# Altium PCB Kelpie_Pi_Hat.PcbDoc
Units mm, origin at the board's own origin, x right, y up, seen from the top; angles counter-clockwise.
Board outline 65 x 30 mm, 2 copper layers (Top Layer, Bottom Layer), stack 1.57 mm thick; 4 components, 23 nets, 71 pads, 1 vias.
Unrouted connection lines stored in the file: 1.
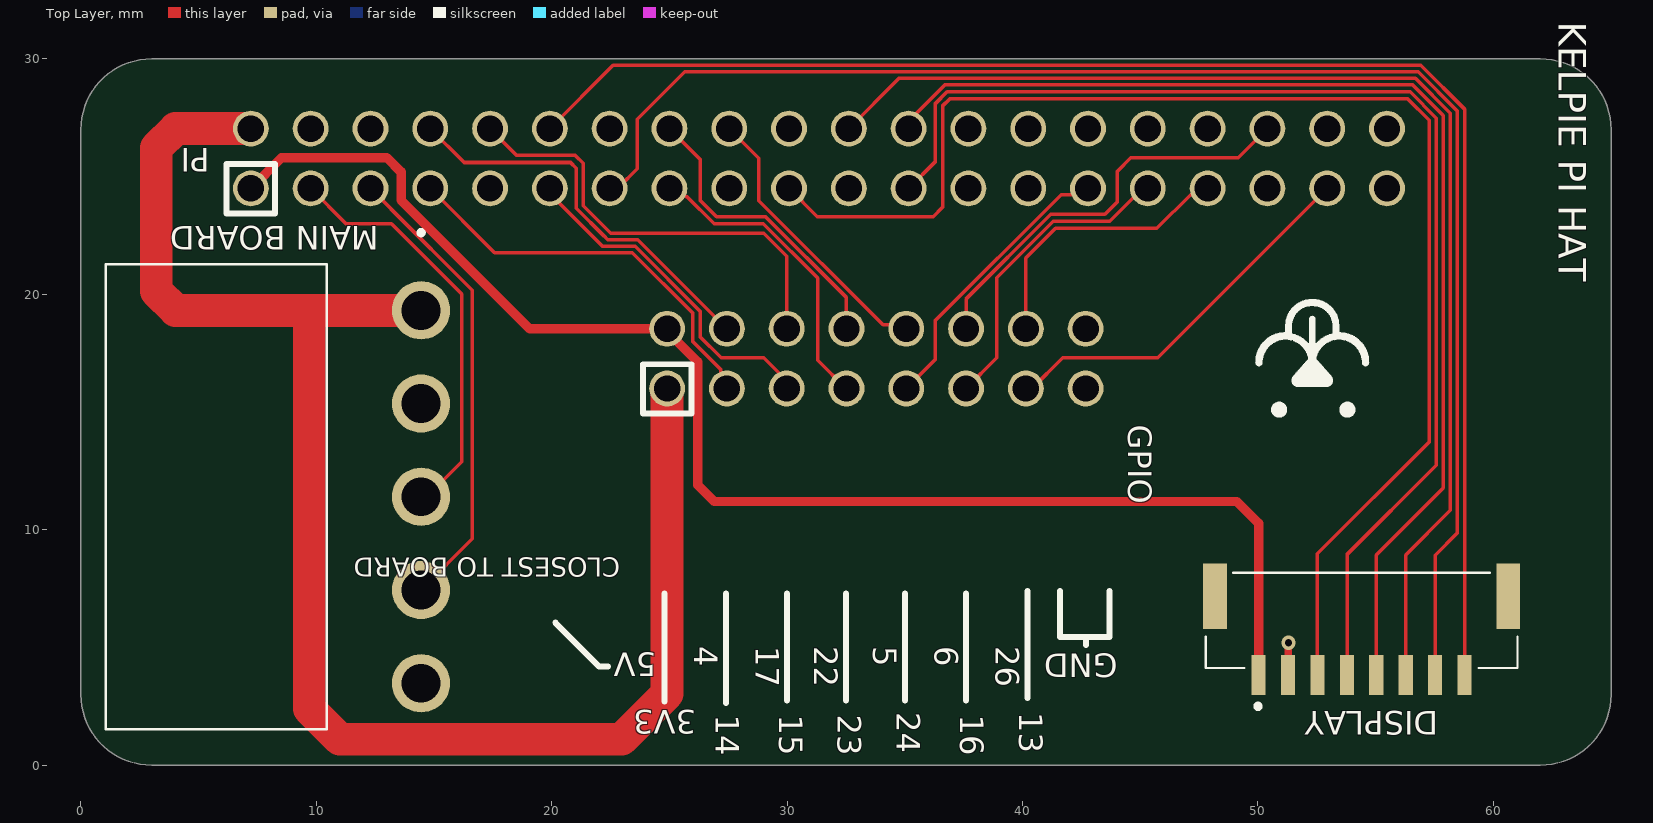
[diagram p0: Top Layer view]
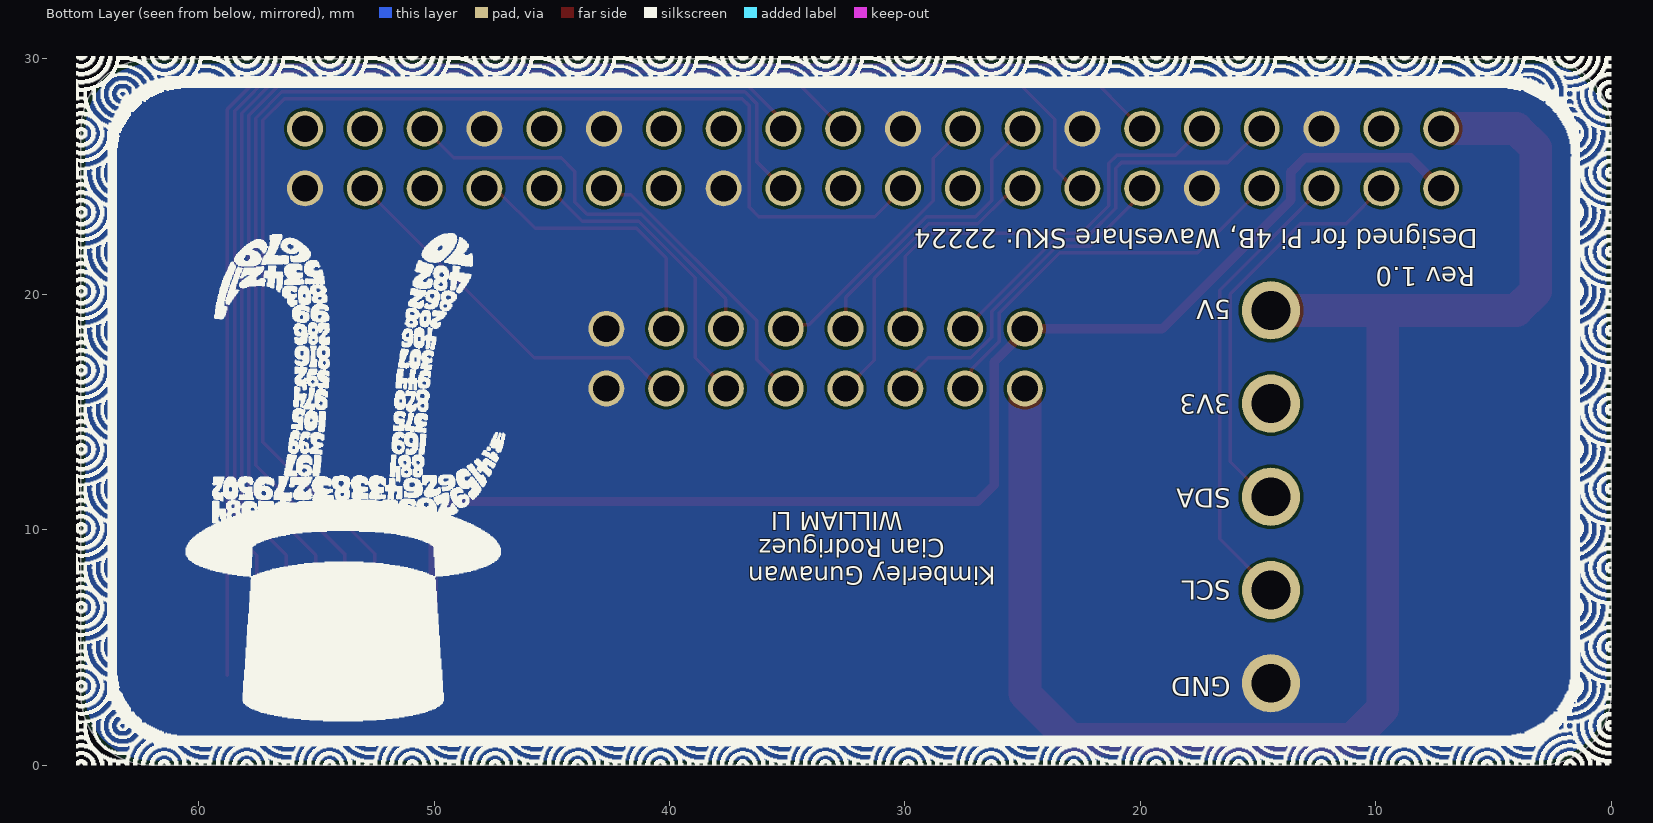
[diagram p1: Bottom Layer view, seen from below]
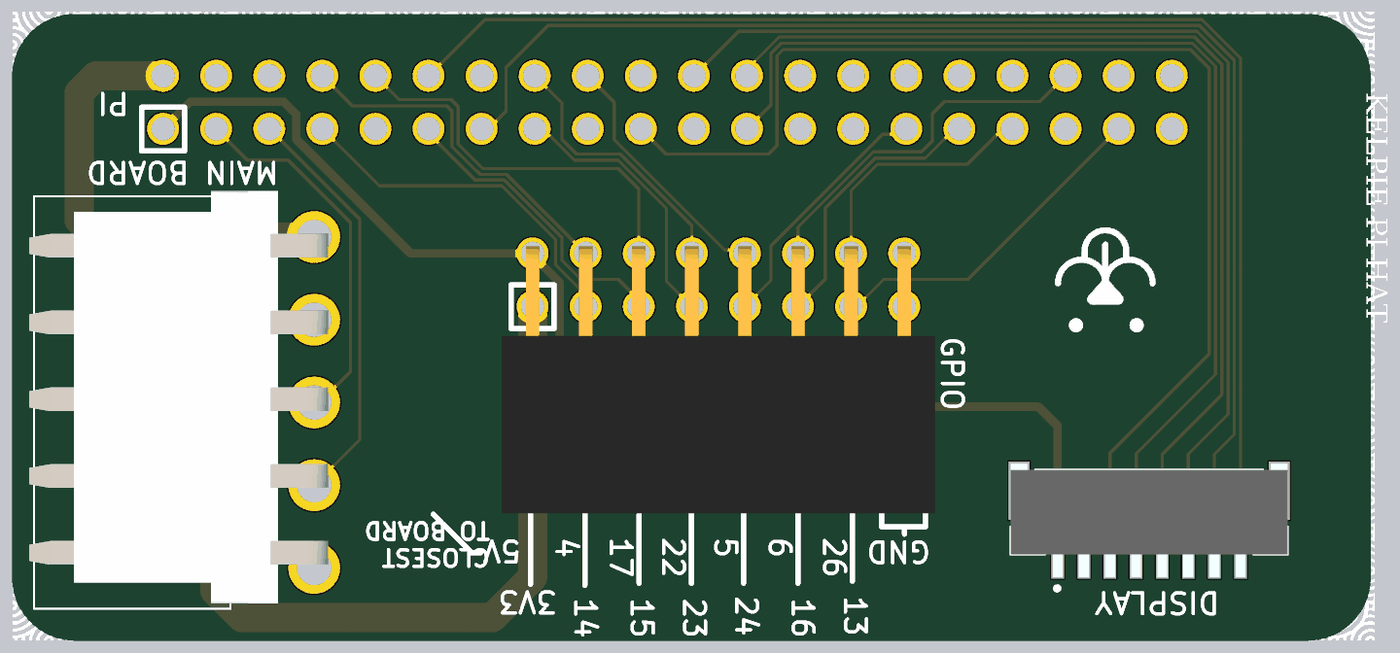
[diagram p2: 3D render of the assembled board from above, using the file's embedded part models]

## Layer stack, top to bottom
Top Solder: solder mask 0.0127, Solder Resist, Dk 3.8
Top Layer: signal copper 0.035
Dielectric: core 1.5, FR-4, Dk 4.5
Bottom Layer: signal copper 0.035
Bottom Solder: solder mask 0.0127, Solder Resist, Dk 3.8

## Board outline
0,3 0,27 cw(c3,27) 3,30 62,30 cw(c62,27) 65,27 65,3 cw(c62,3) 62,0 3,0 cw(c3,3)

## Design rules (kind name [scope] priority, off if disabled: settings)
BoardOutlineClearance [All] p1: gap=0.2 ignorepadtopadclearanceinfootprint=FALSE
Clearance [All] p1: gap=0.127 ignorepadtopadclearanceinfootprint=FALSE except(0.25: Arc-Hole Track-Hole SMDPad-Hole THPad-Hole Via-Hole Fill-Hole Poly-Hole Region-Hole Text-Hole)
ComponentClearance [All] p1: gap=0.127 collisioncheckmode=3 verticalgap=0.127 showdistances=TRUE
DiffPairsRouting [All] p1: maxlimit=0.254 minlimit=0.127 mostfreqgap=0.127 toplayer_minwidth=0.127 toplayer_maxwidth=25.4 toplayer_prefwidth=0.127 bottomlayer_minwidth=0.127 bottomlayer_maxwidth=25.4 bottomlayer_prefwidth=0.127 maxuncoupledlength=12.7
Height [All] p1: minheight=0 maxheight=1816.048 prefheight=12.7
HoleSize [All] p1: absolutevalues=TRUE maxlimit=6.3 minlimit=0.3 maxpercent=80.000 minpercent=20.000
HoleToHoleClearance [All] p1: gap=0.25 allowstackedmicrovias=FALSE
MinimumAnnularRing [All] p1: minimumring=0.076
MinimumSolderMaskSliver [All] p1: minsoldermaskwidth=0
PlaneClearance [All] p1: clearance=0.127
PlaneConnect PlaneConnectPowerPads [InPadClass('PowerPads')] p1: planeconnectstyle=Direct reliefexpansion=0.508 reliefentries=4 reliefconductorwidth=0.254 reliefairgap=0.254
PlaneConnect [All] p2: planeconnectstyle=Direct reliefexpansion=0.3 reliefentries=4 reliefconductorwidth=0.127 reliefairgap=0.127
PolygonConnect PolygonConnectPowerPads [All vs (InPadClass('PowerPads'))] p1: connectstyle=Direct reliefconductorwidth=0.254 reliefentries=4 polygonreliefangle="90 Angle" airgapwidth=0.254
PolygonConnect [All] p2: thpad.connectstyle=Direct thpad.reliefconductorwidth=0.127 thpad.reliefentries=4 thpad.polygonreliefangle="90 Angle" thpad.airgapwidth=0.127 smdpad.connectstyle=Relief smdpad.reliefconductorwidth=0.127 smdpad.reliefentries=4 smdpad.polygonreliefangle="90 Angle" smdpad.airgapwidth=0.127 via.connectstyle=Direct via.reliefconductorwidth=0.127 via.reliefentries=4 via.polygonreliefangle="90 Angle" via.airgapwidth=0.127
RoutingVias [All] p1: holewidth=0.3 width=0.6 viastyle="Through Hole" minholewidth=0.3 minwidth=0.6 maxholewidth=0.6 maxwidth=6.6
SilkToSilkClearance [All] p1: silktosilkclearance=0
SilkToSolderMaskClearance [IsPad] p1: minsilkscreentomaskgap=0.127 clearancetoexposedcopper=TRUE
SolderMaskExpansion [All] p1: expansion=0.075 istentingtop=FALSE
Width [All] p1: maxlimit=25.4 minlimit=0.127 preferedwidth=0.127 minimp=50.000000 maximp=50.000000 favimp=50.000000
20 further rules are at their usual default settings.

## Components (designator, comment, footprint, x,y, rotation, side; value= is the part's Value field where it differs from the comment)
DISPLAY "JST-GH 8Pin Side" BM08BGHSTBTLFSN 54.4,6 r180 top locked (schematic designator J3)
GPIO "8x2_PIN_FEMALE_HEADER" 8x2_PIN_FEMALE_HEADER 24.9,16 r0 top locked (schematic designator J4)
"MAIN BOARD" "JST-VH 5Pin Side" B5PSVHLFSN 14.45,19.32 r270 top locked (schematic designator J2)
PI "PI_HEADER" PI_HEADER 7.22,24.5 r0 top locked (schematic designator J1)

## Footprints (in the part's own frame and the unit in brackets; to place one, negate y for a bottom-side part, rotate by r counter-clockwise, add the part's x,y. Pads: shape width x height; smd on the part's side, far side on the other; paste and mask are expansions set on the pad)
8x2_PIN_FEMALE_HEADER [mil] "https://core-electronics.com.au/0-100-2-54-mm-female-header-2x8-pin-straight.html"
  round 60 hole 44.09: 1(0,0) 2(0,100) 3(100,0) 4(100,100) 5(200,0) 6(200,100) 7(300,0) 8(300,100) 9(400,0) 10(400,100) 11(500,0) 12(500,100) 13(600,0) 14(600,100) 15(700,0) 16(700,100)
  silkscreen extent -41,-42 41,41, body extent -58,-390 758,113, height 188
B5PSVHLFSN [mm]
  round 2.475 hole 1.65: 1(0,0) 2(3.96,0) 3(7.92,0) 4(11.88,0) 5(15.84,0)
  silkscreen extent -3.4,-13.4 17.79,0.1, body extent -2.2,-13.63 17.54,0.66, height 8.48
BM08BGHSTBTLFSN [mm]
  rect 0.6x1.7 smd: 1(4.375,2.175) 2(3.125,2.175) 3(1.875,2.175) 4(0.625,2.175) 5(-0.625,2.175) 6(-1.875,2.175) 7(-3.125,2.175) 8(-4.375,2.175)
  rect 1x2.8 smd: 9(-6.225,-1.175) 10(6.225,-1.175)
  silkscreen extent -6.63,-2.17 6.63,3.6, body extent -6.63,-2.47 6.63,2.97, height 4.15
PI_HEADER [mil] "40 Pin (20x2) Female Header Row (Adafruit 2243)"
  round 60 hole 44.09: 1(0,0) 2(0,100) 3(100,0) 4(100,100) 5(200,0) 6(200,100) 7(300,0) 8(300,100) 9(400,0) 10(400,100) 11(500,0) 12(500,100) 13(600,0) 14(600,100) 15(700,0) 16(700,100) 17(800,0) 18(800,100) 19(900,0) 20(900,100) 21(1000,0) 22(1000,100) 23(1100,0) 24(1100,100) 25(1200,0) 26(1200,100) 27(1300,0) 28(1300,100) 29(1400,0) 30(1400,100) 31(1500,0) 32(1500,100) 33(1600,0) 34(1600,100) 35(1700,0) 36(1700,100) 37(1800,0) 38(1800,100) 39(1900,0) 40(1900,100)
  silkscreen extent -41,-42 41,41, body extent -65,-47 1963,150, height 83

## Part data
DISPLAY: library part BM08B-GHS-TBT_LF__SN_, "Connector", Manufacturer_Name="JST (JAPAN SOLDERLESS TERMINALS)", Manufacturer_Part_Number=BM08B-GHS-TBT(LF)(SN), Datasheet Link=http://www.jst-mfg.com/product/pdf/eng/eGH.pdf, Height=4.05mm
GPIO: "https://core-electronics.com.au/0-100-2-54-mm-female-header-2x8-pin-straight.html"
"MAIN BOARD": library part B5PS-VH_LF__SN_, "Connector", Arrow Part Number=B5PS-VH(LF)(SN), Manufacturer_Name="JST (JAPAN SOLDERLESS TERMINALS)", Arrow Price/Stock=https://www.arrow.com/en/products/b5ps-vh-lf-sn/jst-manufacturing?region=europe, Datasheet Link=http://uk.rs-online.com/web/p/products/8201166, Height=8.5mm, Manufacturer_Part_Number=B5PS-VH(LF)(SN)
PI: "40 Pin (20x2) Pi Header (Adafruit 2243)"

## Via types
v1: diameter 0.6, hole 0.3, Top Layer to Bottom Layer, tented both sides, 1 vias

## Nets (pads, with @x,y where several pads share a name; then routed paths per layer and width w, separated by ;. In a path a pad name is that pad's centre, name@x,y a point inside that pad or via, vN(x,y) a via of type N, cw(c..) or ccw(c..) an arc to the next point about the centre after c; other vN are vias at no path point)
3V3: DISPLAY.1 GPIO.2 PI.1 | length 60.1
  Top Layer w0.4: PI.1 8.52,25.8 13,25.8 13.6,25.2 13.6,24 19.06,18.54 GPIO.2 24.9,18.431 26.2,17.131 26.2,11.9 26.9,11.2 49.1,11.2 50.025,10.275 DISPLAY.1
+5: "MAIN BOARD.1" GPIO.1 PI.2 PI.4 | length 67.1
  Top Layer w1.4: PI.2 4.02,27.04 3.2,26.22 3.2,20.14 4.02,19.32 13.383,19.32 ; 9.7,18.717 9.7,2.4 11,1.1 22.966,1.1 24.9,3.034 GPIO.1 ; 14.159,19.32 14.45,19.32
BL: DISPLAY.8 PI.12 | length 64.8
  Top Layer w0.15: PI.12 22.605,29.725 56.92,29.725 58.775,27.87 DISPLAY.8
CLK: DISPLAY.4 PI.23 | length 51.3
  Top Layer w0.15: PI.23 36.3,25.64 36.3,28.108 36.792,28.6 56.462,28.6 57.575,27.487 57.575,12.741 53.784,8.95 DISPLAY.4@53.784,3.825
CS: DISPLAY.5 PI.24 | length 49.2
  Top Layer w0.15: PI.24 35.16,27.36 36.694,28.894 56.576,28.894 57.875,27.595 57.875,11.775 55.025,8.925 DISPLAY.5
DC: DISPLAY.6 PI.22 | length 51.7
  Top Layer w0.15: PI.22 34.751,29.171 56.691,29.171 58.175,27.687 58.175,10.825 56.275,8.925 DISPLAY.6
DIN: DISPLAY.3 PI.19 | length 58.2
  Top Layer w0.15: PI.19 31.28,23.3 36.2,23.3 36.6,23.7 36.6,28 36.9,28.3 56.37,28.3 57.275,27.395 57.275,13.725 52.525,8.975 DISPLAY.3
GND: "MAIN BOARD.5" DISPLAY.2 GPIO.15 GPIO.16 PI.6 PI.9 PI.14 PI.20 PI.25 PI.30 PI.34 PI.39 | length 1.4
  Top Layer w0.3: DISPLAY.2 51.287,3.838 51.287,5.188 v1(51.3,5.2)
GPIO_4: GPIO.3 PI.7 | length 17.1
  Top Layer w0.15: PI.7 17.571,21.769 23.428,21.769 26,19.197 26,17.986 27.177,16.809 GPIO.3@27.177,16.263 ; GPIO.3@27.222,16.218 GPIO.3
GPIO_5: GPIO.9 PI.29 | length 12.2
  Top Layer w0.15: GPIO.9 36.3,17.24 36.3,18.9 41.637,24.237 42.517,24.237 PI.29
GPIO_6: GPIO.11 PI.31 | length 13.2
  Top Layer w0.15: GPIO.11 38.9,17.3 38.9,20.7 41.3,23.1 43.7,23.1 45.1,24.5 PI.31
GPIO_16: GPIO.12 PI.36 | length 17.8
  Top Layer w0.15: GPIO.12 37.6,19.8 41.2,23.4 43.5,23.4 44.032,23.932 44.032,25.232 44.6,25.8 49.16,25.8 PI.36
GPIO_17: GPIO.5 PI.11 | length 14.5
  Top Layer w0.15: PI.11 19.92,24.28 22.154,22.046 23.542,22.046 26.3,19.288 26.3,18.2 27.2,17.3 29.008,17.3 29.98,16.328 GPIO.5
GPIO_22: GPIO.7 PI.15 | length 13.1
  Top Layer w0.15: PI.15 25.372,24.5 25.72,24.152 25.748,24.152 26.9,23 28.992,23 31.3,20.692 31.3,17.2 32.5,16 GPIO.7
GPIO_23: GPIO.8 PI.16 | length 12.8
  Top Layer w0.15: PI.16 26.3,25.74 26.3,24 27,23.3 29.083,23.3 32.52,19.863 GPIO.8
GPIO_24: GPIO.10 PI.18 | length 12.1
  Top Layer w0.15: PI.18 28.8,25.78 28.8,23.975 34.073,18.702 34.898,18.702 GPIO.10
GPIO_26: GPIO.13 PI.37 | length 16.3
  Top Layer w0.15: GPIO.13 40.4,16 41.7,17.3 45.74,17.3 PI.37
PWM1: GPIO.14 PI.33 | length 11.9
  Top Layer w0.15: GPIO.14 40.14,21.54 41.4,22.8 45.7,22.8 47.137,24.237 47.597,24.237 PI.33
RST: DISPLAY.7 PI.13 | length 64.3
  Top Layer w0.15: PI.13@22.519,24.559 22.859,24.559 23.632,25.332 23.632,27.432 25.648,29.448 56.805,29.448 58.475,27.778 58.475,9.875 57.523,8.923 DISPLAY.7@57.523,3.825
RX: GPIO.6 PI.10 | length 19
  Top Layer w0.15: PI.10 18.52,25.9 21,25.9 21.334,25.566 21.334,23.766 22.5,22.6 29,22.6 29.98,21.62 GPIO.6
SCL: "MAIN BOARD.4" PI.5 | length 19.8
  Top Layer w0.15: PI.5 12.304,24.5 13.173,23.631 13.173,23.623 16.627,20.169 16.627,9.617 14.45,7.44
SDA: "MAIN BOARD.3" PI.3 | length 17.8
  Top Layer w0.15: PI.3 11.26,23 13.192,23 16.181,20.012 16.181,12.881 14.7,11.4 14.45,11.4
TX: GPIO.4 PI.8 | length 17.1
  Top Layer w0.15: PI.8 16.28,25.6 20.8,25.6 21.041,25.359 21.041,23.659 22.223,22.477 22.231,22.477 22.385,22.323 23.657,22.323 GPIO.4
pads on no net: "MAIN BOARD.2" DISPLAY.9 DISPLAY.10 PI.17 PI.21 PI.26 PI.27 PI.28 PI.32 PI.35 PI.38 PI.40

## Polygon pours and split planes (outlines as drawn)
GND on Bottom Layer "GND_L02_P000" (solid, pour order 0): 0,0 0,30.5 0.5,31 66,31 66,0.1 65.9,0

## Silkscreen, mask and mechanical layers (free items; w line width, h text height)
Top Overlay:
  drawing of 17 lines, arcs and shapes, not listed
  text "KELPIE PI HAT" at 62.4,31.6 h2 r270
  text "CLOSEST TO BOARD" at 22.9,8.8 h0.8 r180
  text "4" at 26.06,5.04 h1 r270
  text "17" at 28.66,5.04 h1 r270
  text "22" at 31.16,5.04 h1 r270
  text "5" at 33.66,5.04 h1 r270
  text "6" at 36.26,5.04 h1 r270
  text "26" at 38.86,5.04 h1 r270
  text "5V" at 24.44,4.774 h1 r180
  text "GND" at 44.04,4.74 h1 r180
  text "3V3" at 26.133,2.34 h1 r180
  text "24" at 34.66,2.24 h1 r270
  text "13" at 39.86,2.24 h1 r270
  text "14" at 26.96,2.14 h1 r270
  text "15" at 29.66,2.14 h1 r270
  text "23" at 32.16,2.14 h1 r270
  text "16" at 37.36,2.14 h1 r270
Bottom Overlay:
  drawing of 177 lines, arcs and shapes, not listed
  text "Designed for Pi 4B, Waveshare SKU: 22224" at 5.66,22.773 h0.8 r180
  text "Rev 1.0" at 5.76,21.14 h0.8 r180
  text "5V" at 16.16,19.74 h0.8 r180
  text "3V3" at 16.16,15.74 h0.8 r180
  text "SDA" at 16.16,11.74 h0.8 r180
  text "WILLIAM LI" at 30.086,11 h1.3 r180
  text "Cian Rodriguez" at 28.306,9.848 h1.3 r180
  text "Kimberley Gunawan" at 26.132,8.682 h1.3 r180
  text "SCL" at 16.16,7.84 h0.8 r180
  text "GND" at 16.16,3.74 h0.8 r180
Mechanical 1:
  the board outline again, w0.254